# Altium PCB AUX_POWER_V2.PcbDoc
Units mil, origin at the board's own origin, x right, y up, seen from the top; angles counter-clockwise.
Board outline 1050.03 x 970.03 mil, 2 copper layers (Top Layer, Bottom Layer); 16 components, 4 nets, 28 pads, 0 vias.
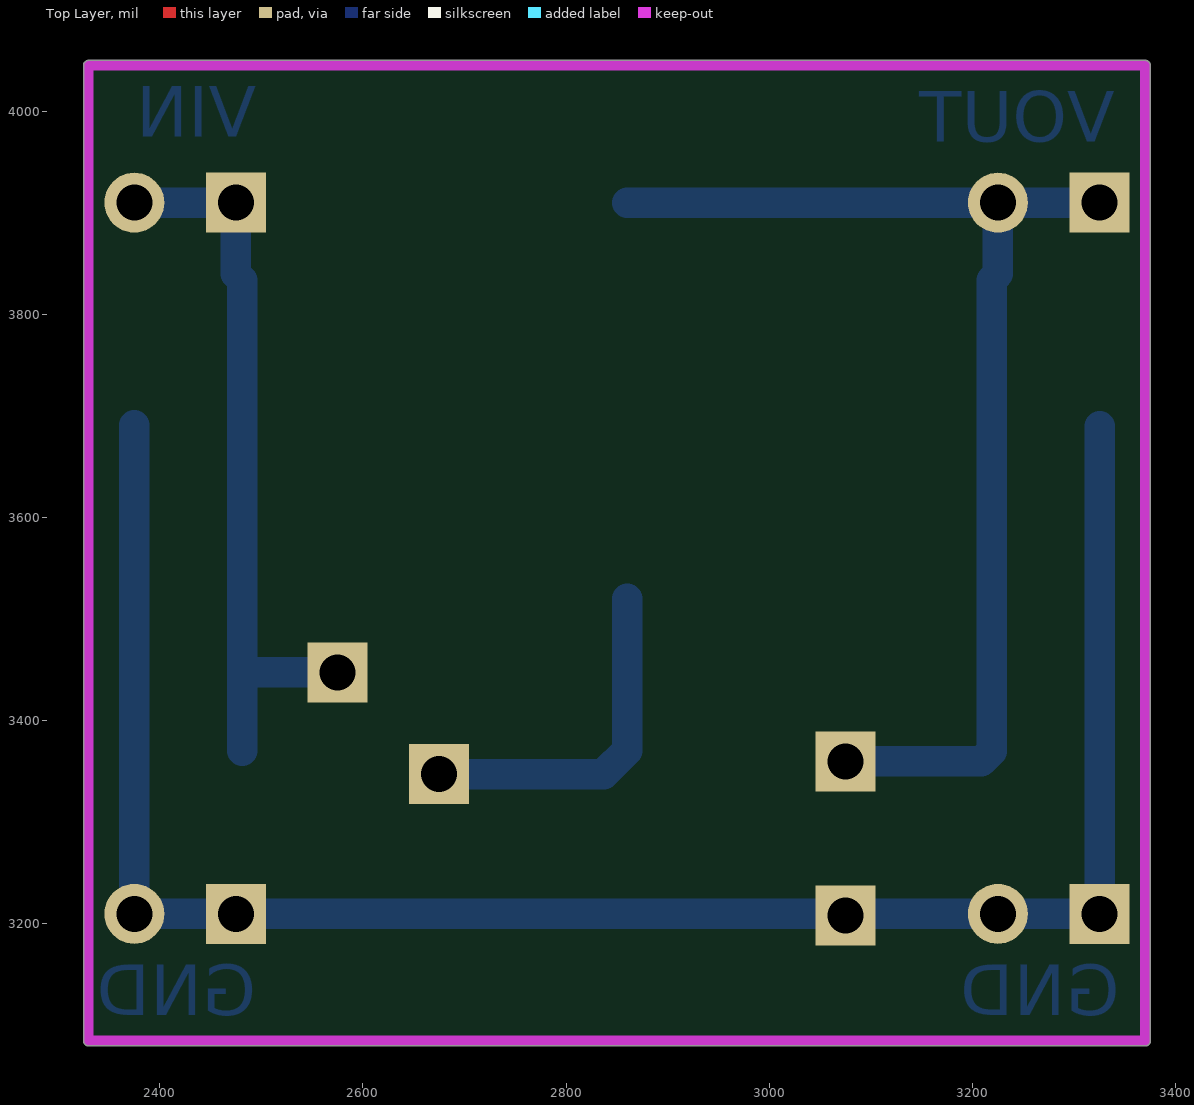
[diagram p0: Top Layer view]
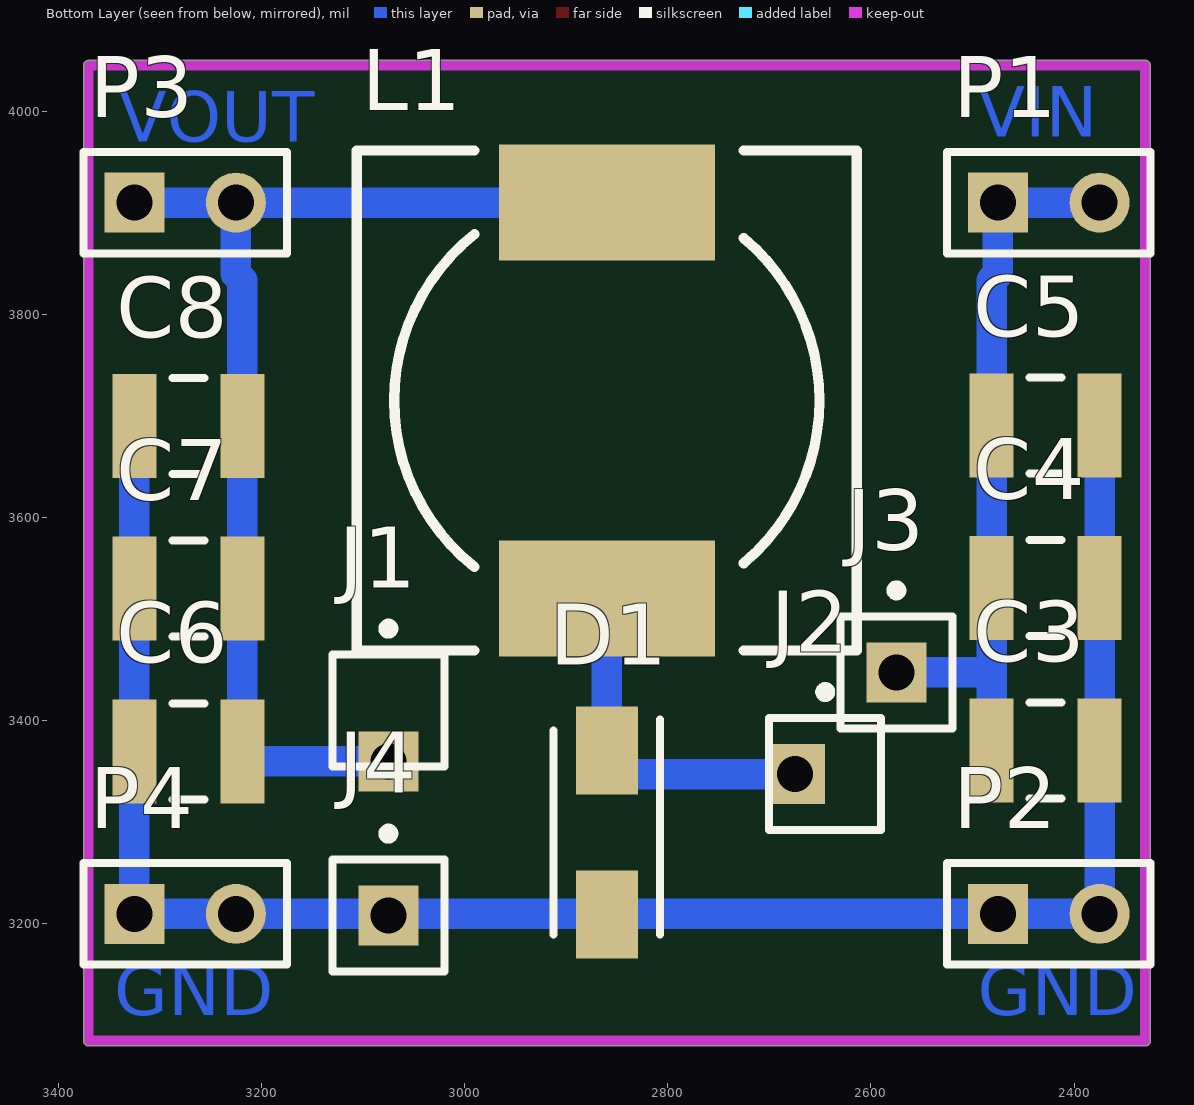
[diagram p1: Bottom Layer view, seen from below]

## Layer stack, top to bottom
Top Solder: solder mask 0.4, Solder Resist, Dk 3.5
Top Layer: signal copper 1.4
Dielectric 1: dielectric 12.6, FR-4, Dk 4.8
Bottom Layer: signal copper 1.4
Bottom Solder: solder mask 0.4, Solder Resist, Dk 3.5

## Board outline
3370,3079.99 ccw(c3370,3085) 3375.01,3085 3375.01,4045 ccw(c3370,4045) 3370,4050.01 2330,4050.01 ccw(c2330,4045) 2324.99,4045 2324.99,3085 ccw(c2330,3085) 2330,3079.99

## Design rules (kind name [scope] priority, off if disabled: settings)
Clearance [All] p1: gap=0 ignorepadtopadclearanceinfootprint=FALSE except(10: Arc-Arc Arc-Track Arc-SMDPad Arc-THPad Track-Track Track-SMDPad Track-THPad SMDPad-SMDPad SMDPad-THPad THPad-THPad)
PolygonConnect [All] p1: connectstyle=Relief reliefconductorwidth=10 reliefentries=4 polygonreliefangle="90 Angle" airgapwidth=10
RoomDefinition AUX_POWER_V2 [InComponentClass('AUX_POWER_V2')] p1: confinementstyle=ConfineIn formatcopy=TRUE lockcomponents=FALSE outline 3370,3085 2330,3085 2330,4045 3370,4045
RoutingLayers [All] p1: top layer_v5=FALSE bottom layer_v5=TRUE
RoutingVias [All] p1: holewidth=28 width=50 viastyle="Through Hole" minholewidth=28 minwidth=50 maxholewidth=28 maxwidth=50
SolderMaskExpansion [All] p1: expansion=4
Width [All] p1: maxlimit=50 minlimit=10 preferedwidth=30 bottomlayer_prefwidth=10 minimp=50.000000 maximp=50.000000 favimp=50.000000
29 further rules are at their usual default settings.

## Classes and differential pairs
component class AUX_POWER_V2: C3 C4 C5 C6 C7 C8 D1 J2 J3 J4 L1 P1 P2 P3 P4

## Components (designator, comment, footprint, x,y, rotation, side; value= is the part's Value field where it differs from the comment)
C3 "Cap" C1210 2428.15,3370.71 r0 bottom value=47uF
C4 "Cap" C1210 2428.15,3530.71 r0 bottom value=47uF
C5 "Cap" C1210 2428.15,3690.71 r0 bottom value=47uF
C6 "Cap" C1210 3271.85,3370 r180 bottom value=47uF
C7 "Cap" C1210 3271.85,3530 r180 bottom value=47uF
C8 "Cap" C1210 3271.85,3690 r180 bottom value=47uF
D1 "US1M-E3_5AT" DIOM5127X229N 2860,3290 r270 bottom
J1 "Socket" PIN1#1 3075,3410 r180 bottom
J2 "Socket" PIN1#2 2645,3347.56 r180 bottom
J3 "Socket" PIN1#3 2575,3447.56 r180 bottom
J4 "Socket" PIN1#3 3075,3208.23 r180 bottom
L1 "Inductor Iron" CDRH127 2860,3715.12 r90 bottom value=47mH
P1 "Header 2" HDR1X2 2475,3910 r180 bottom
P2 "Header 2" HDR1X2 2475,3210 r180 bottom
P3 "Header 2" HDR1X2 3325,3910 r180 bottom
P4 "Header 2" HDR1X2 3325,3210 r180 bottom

## Footprints (in the part's own frame and the unit in brackets; to place one, negate y for a bottom-side part, rotate by r counter-clockwise, add the part's x,y. Pads: shape width x height; smd on the part's side, far side on the other; paste and mask are expansions set on the pad)
C1210 [mm] "Chip Capacitor, Body 3.2x2.5mm, IPC High Density"
  rect 1.1x2.6 smd: 1(-1.35,0) 2(1.35,0)
  silkscreen extent -0.4,-1.2 0.4,1.2, body extent -1.7,-1.35 1.7,1.35, height 1.3
CDRH127 [mm]
  rect 2.9x5.4 smd: 1(-4.95,0) 2(4.95,0)
  silkscreen extent -6.25,-6.25 6.25,6.25, body extent -6,-6 6,6, height 2.8
DIOM5127X229N [mm]
  rect 2.2x1.55 smd: 1(-2.05,0) 2(2.05,0)
  silkscreen extent -2.83,-1.33 2.55,1.33, body extent -2.55,-1.33 2.55,1.33, height 2.29
HDR1X2 [mm] "Connector; Header; 2 Position"
  rect 1.5x1.5 hole 0.9: 1(0,0)
  round 1.5 hole 0.9: 2(2.54,0)
  silkscreen extent -1.27,-1.27 3.81,1.27
PIN1#1 [mm] "Connector; Plug"
  rect 1.5x1.5 hole 0.9: 1(0,-1.27)
  silkscreen extent -1.4,-1.4 1.4,2.17
PIN1#2 [mm] "Connector; Plug"
  rect 1.5x1.5 hole 0.9: 1(-0.762,0)
  silkscreen extent -1.4,-1.4 1.4,2.17
PIN1#3 [mm] "Connector; Plug"
  rect 1.5x1.5 hole 0.9: 1(0,0)
  silkscreen extent -1.4,-1.4 1.4,2.17

## Part data
C3 C4 C5 C6 C7 C8: "Capacitor", LatestRevisionDate=17-Jul-2002, LatestRevisionNote="Re-released for DXP Platform.", PackageDescription="Radial Cap, Thru-Hole; 2 Leads; 0.3 in Pin Spacing", PackageReference=RAD-0.3, Published=8-Jun-2000, Publisher="Altium Limited"
D1: "Diode", Manufacturer_Name=Vishay, Manufacturer_Part_Number=US1M-E3/5AT, Mouser Part Number=625-US1M-E3/5AT, RS Part Number=9190755, Allied_Number=R1082668, Allied Price/Stock=https://www.alliedelec.com/vishaydale-us1m-e3-5at/R1082668/, Datasheet Link=https://www.vishay.com/docs/88768/us1.pdf, Height=2.29mm, Mouser Price/Stock=https://www.mouser.com/Search/Refine.aspx?Keyword=625-US1M-E3%2F5AT, RS Price/Stock=http://uk.rs-online.com/web/p/products/9190755
L1: "Magnetic-Core Inductor", LatestRevisionDate=17-Jul-2002, LatestRevisionNote="Re-released for DXP Platform.", PackageDescription="Axial Device, Thru-Hole; 2 Leads; 0.9 in Pin Spacing", PackageReference=AXIAL-0.9, Published=24-Mar-1999, Publisher="Altium Limited"
P1 P2 P3 P4: "Header, 2-Pin", LatestRevisionDate=17-Jul-2002, LatestRevisionNote="Re-released for DXP Platform.", Publisher="Altium Limited"
J1 J2 J3 J4: LatestRevisionDate=17-Jul-2002, LatestRevisionNote="Re-released for DXP Platform.", Publisher="Altium Limited"

## Nets (pads, with @x,y where several pads share a name; then routed paths per layer and width w, separated by ;. In a path a pad name is that pad's centre, name@x,y a point inside that pad or via, vN(x,y) a via of type N, cw(c..) or ccw(c..) an arc to the next point about the centre after c; other vN are vias at no path point)
GND: C3.1 C4.1 C5.1 C6.1 C7.1 C8.1 D1.2 J4.1 P2.1 P2.2 P4.1 P4.2 | length 1910.7
  Bottom Layer w30: C5.1 C4.1 C3.1 P2.2 P2.1 2725,3210 P4.2 P4.1 C6.1 C7.1 C8.1
NetD1_1: D1.1 J2.1 L1.1 | length 344.1
  Bottom Layer w30: J2.1 2836.85,3347.56 D1.1 L1.1
VIN: C3.2 C4.2 C5.2 J3.1 P1.1 P1.2 | length 738.9
  Bottom Layer w30: P1.2 P1.1 2475,3840 2481.3,3833.7 C5.2 C4.2 2481.3,3450.71 ; C3.2 2481.3,3450.71 ; J3.1 2489.33,3447.56 2483.74,3453.15 2481.3,3450.71
VOUT: C6.2 C7.2 C8.2 J1.1 L1.2 P3.1 P3.2 | length 1155.5
  Bottom Layer w30: L1.2 P3.2 ; J1.1 3208.7,3360 C6.2 C7.2 C8.2 3218.7,3833.7 3225,3840 P3.2 ; P3.1 P3.2

## Keep-outs
Keep-Out Layer:
  lines w10: 2330,3085 2330,4045 3370,4045 3370,3085 2330,3085

## Other copper
Bottom Layer:
  text "VIN" at 2495,3975 h50
  text "VOUT" at 3340,3970 h50
  text "GND" at 2495,3110 h50
  text "GND" at 3345,3110 h50